# Altium PCB PCB_V11.PcbDoc
Units mm, origin at the board's own origin, x right, y up, seen from the top; angles counter-clockwise.
Board outline 38 x 30.4 mm, 4 copper layers (Top Layer, Int1 (GND), Int2 (GND), Bottom Layer), stack 1.11 mm thick; 32 components, 23 nets, 138 pads, 107 vias.
Unrouted connection lines stored in the file: 4.
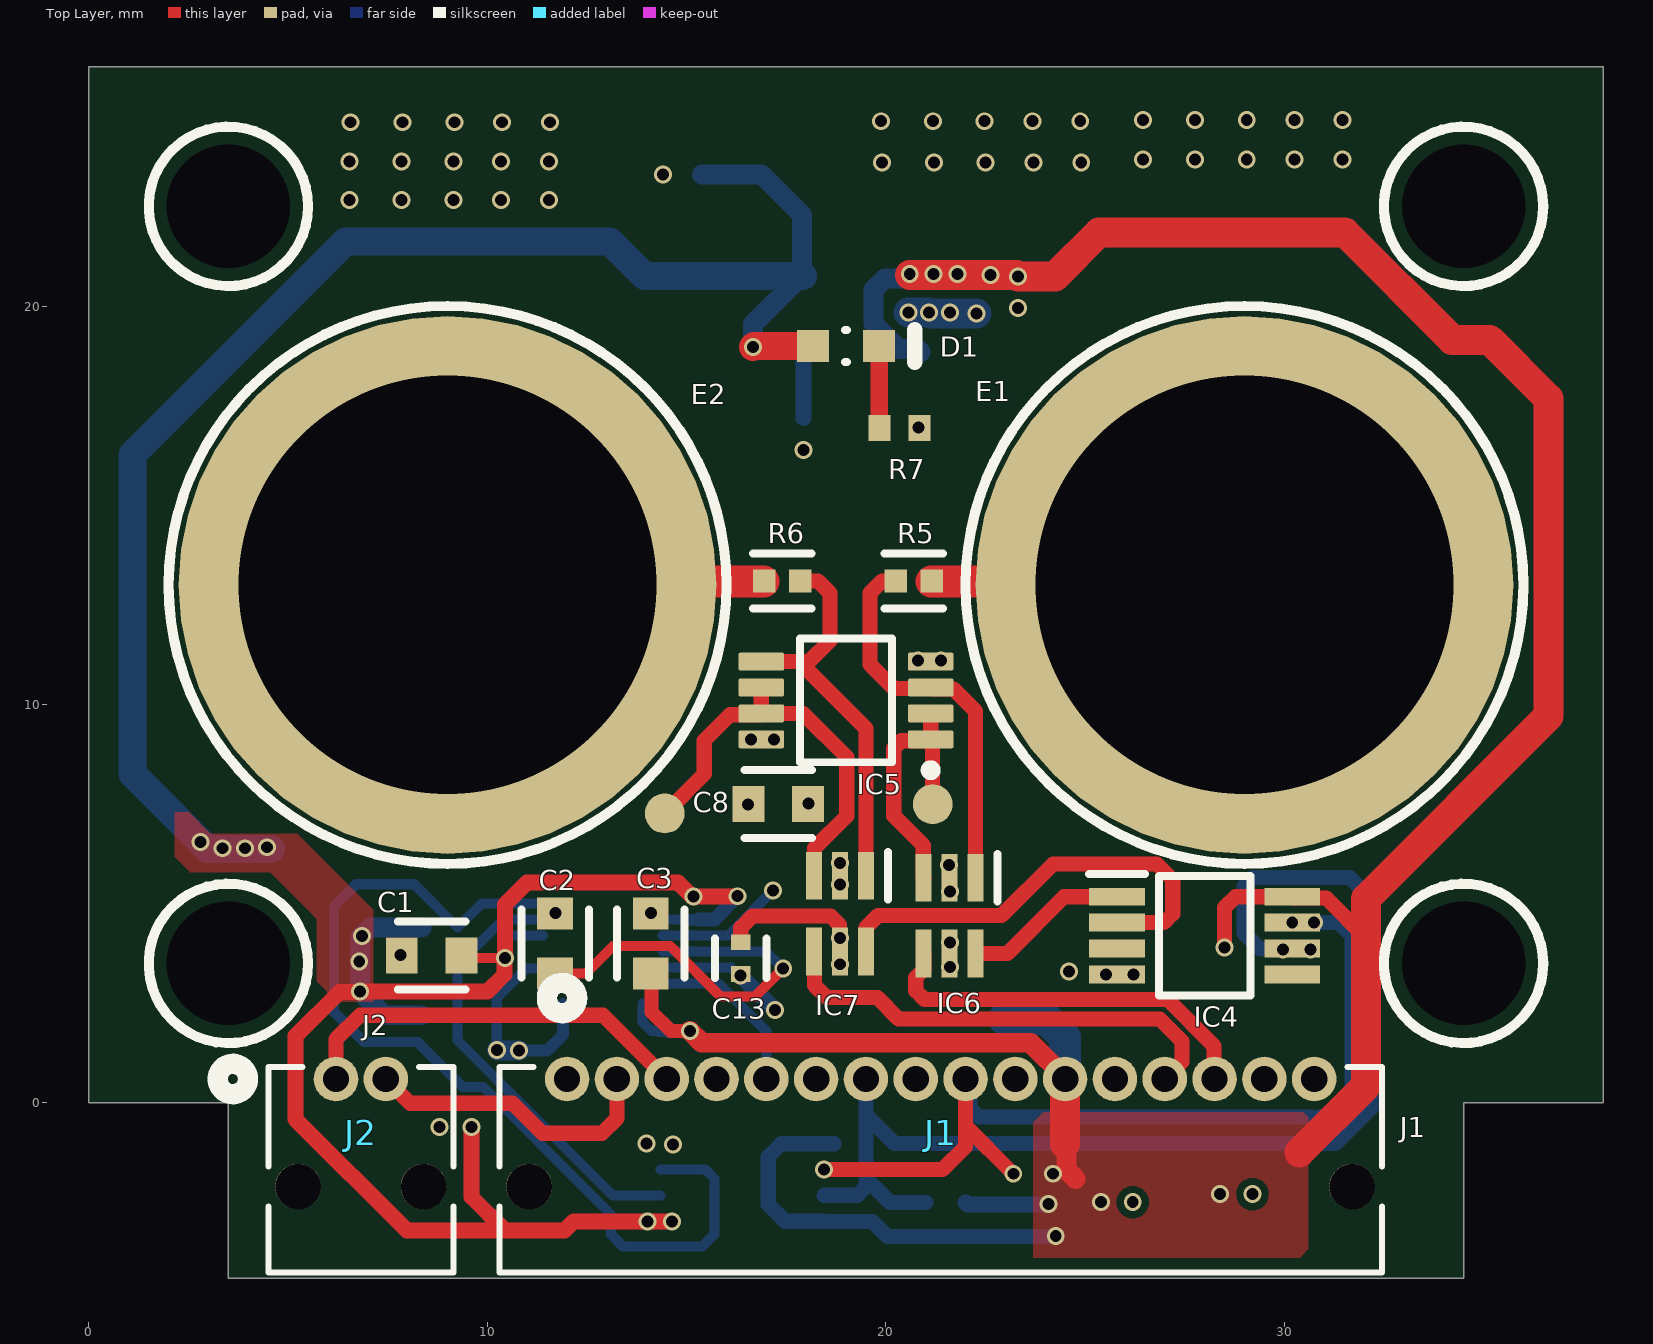
[diagram p0: Top Layer view]
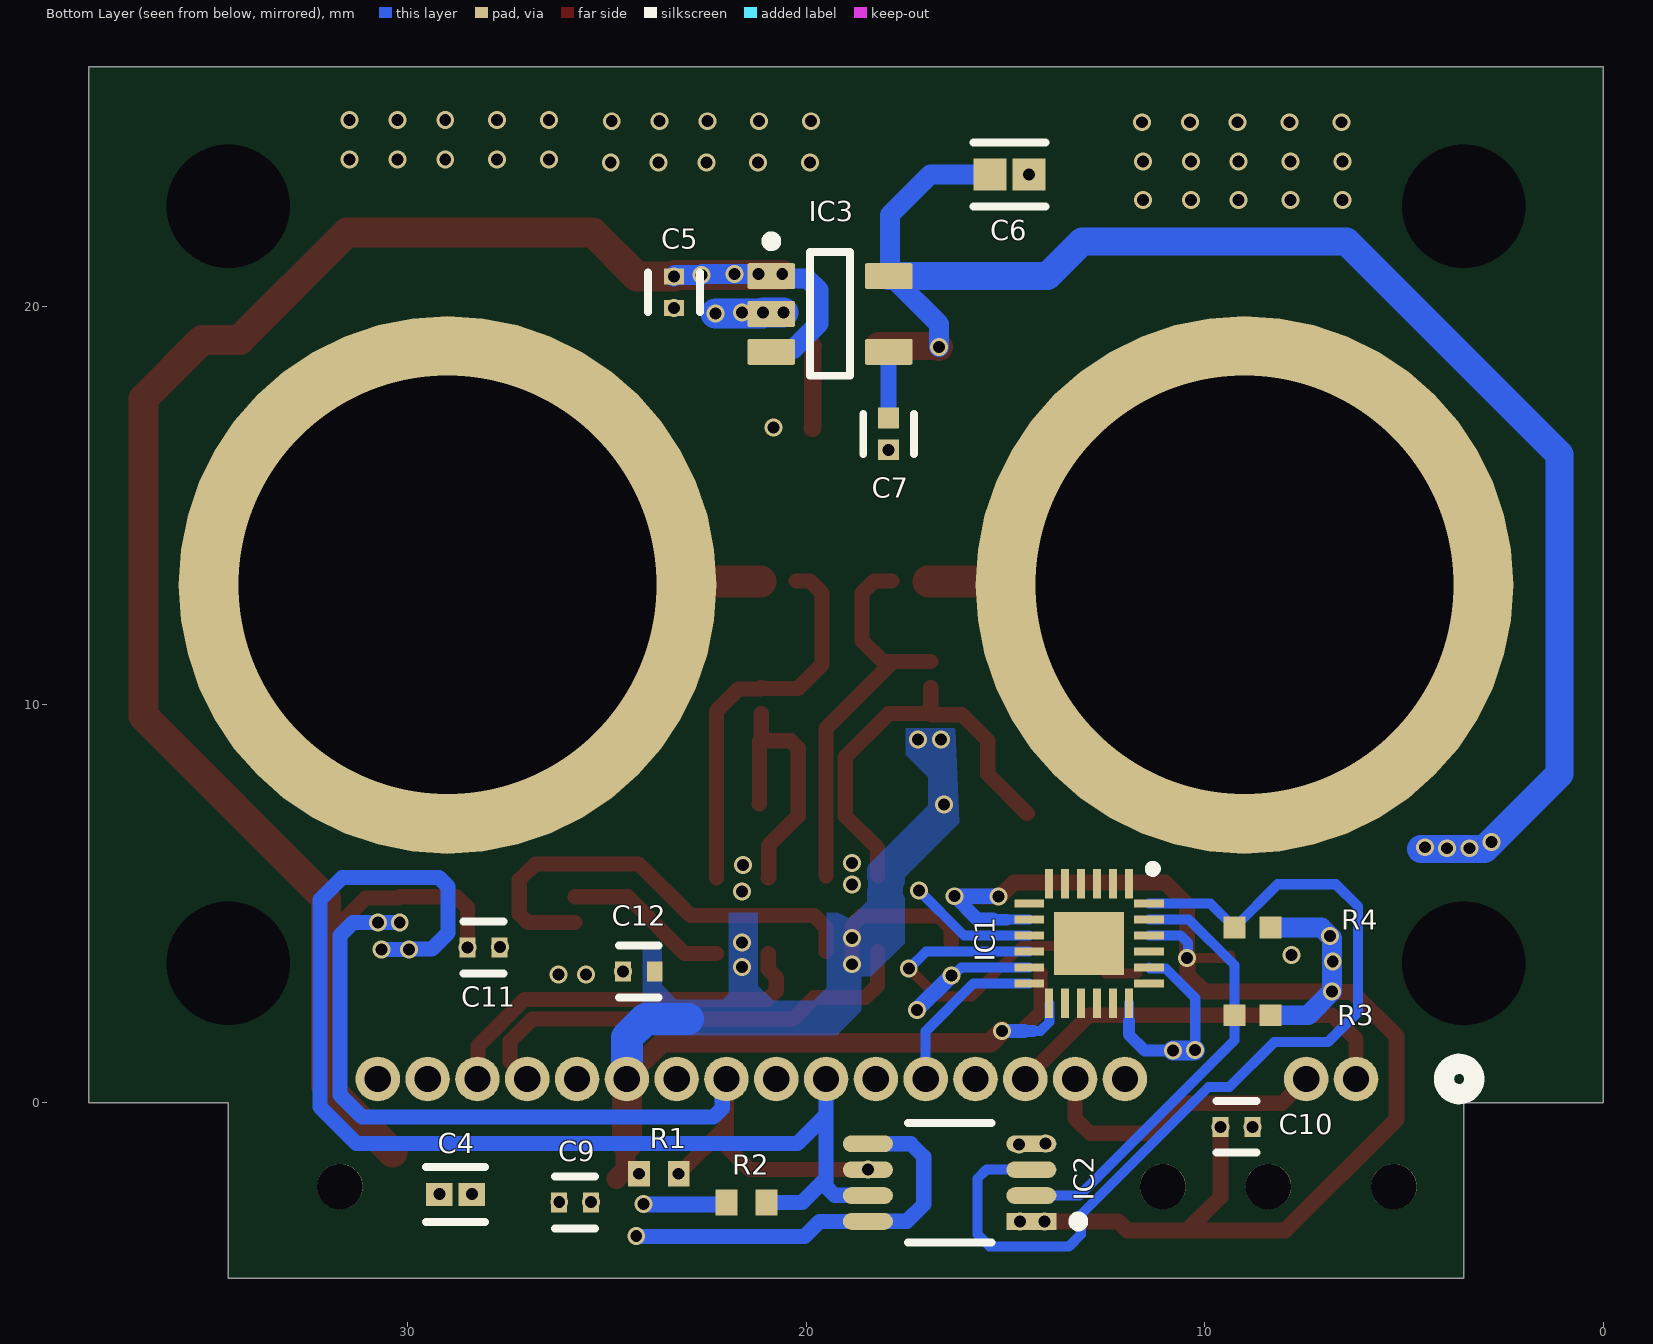
[diagram p1: Bottom Layer view, seen from below]
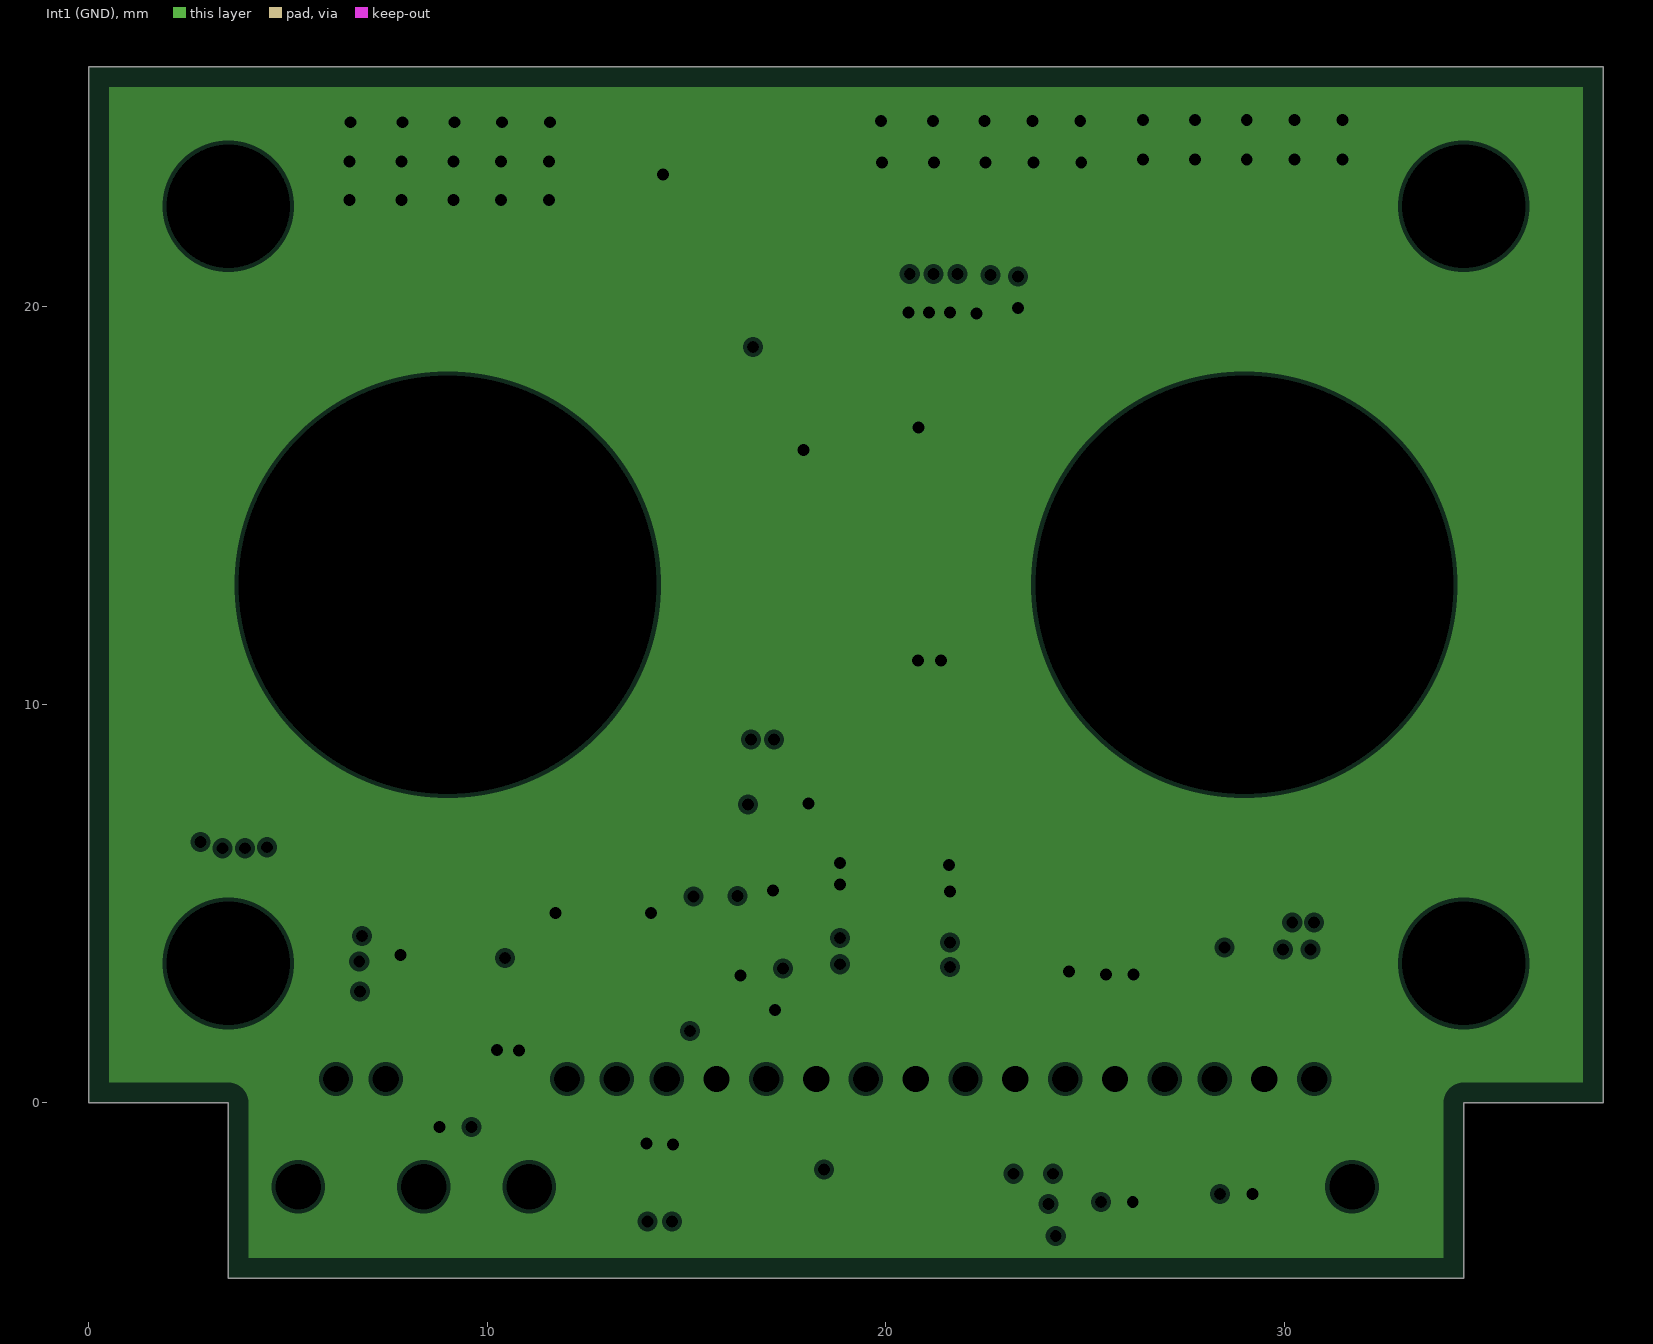
[diagram p2: Int1 (GND), clearances drawn from the general rule]
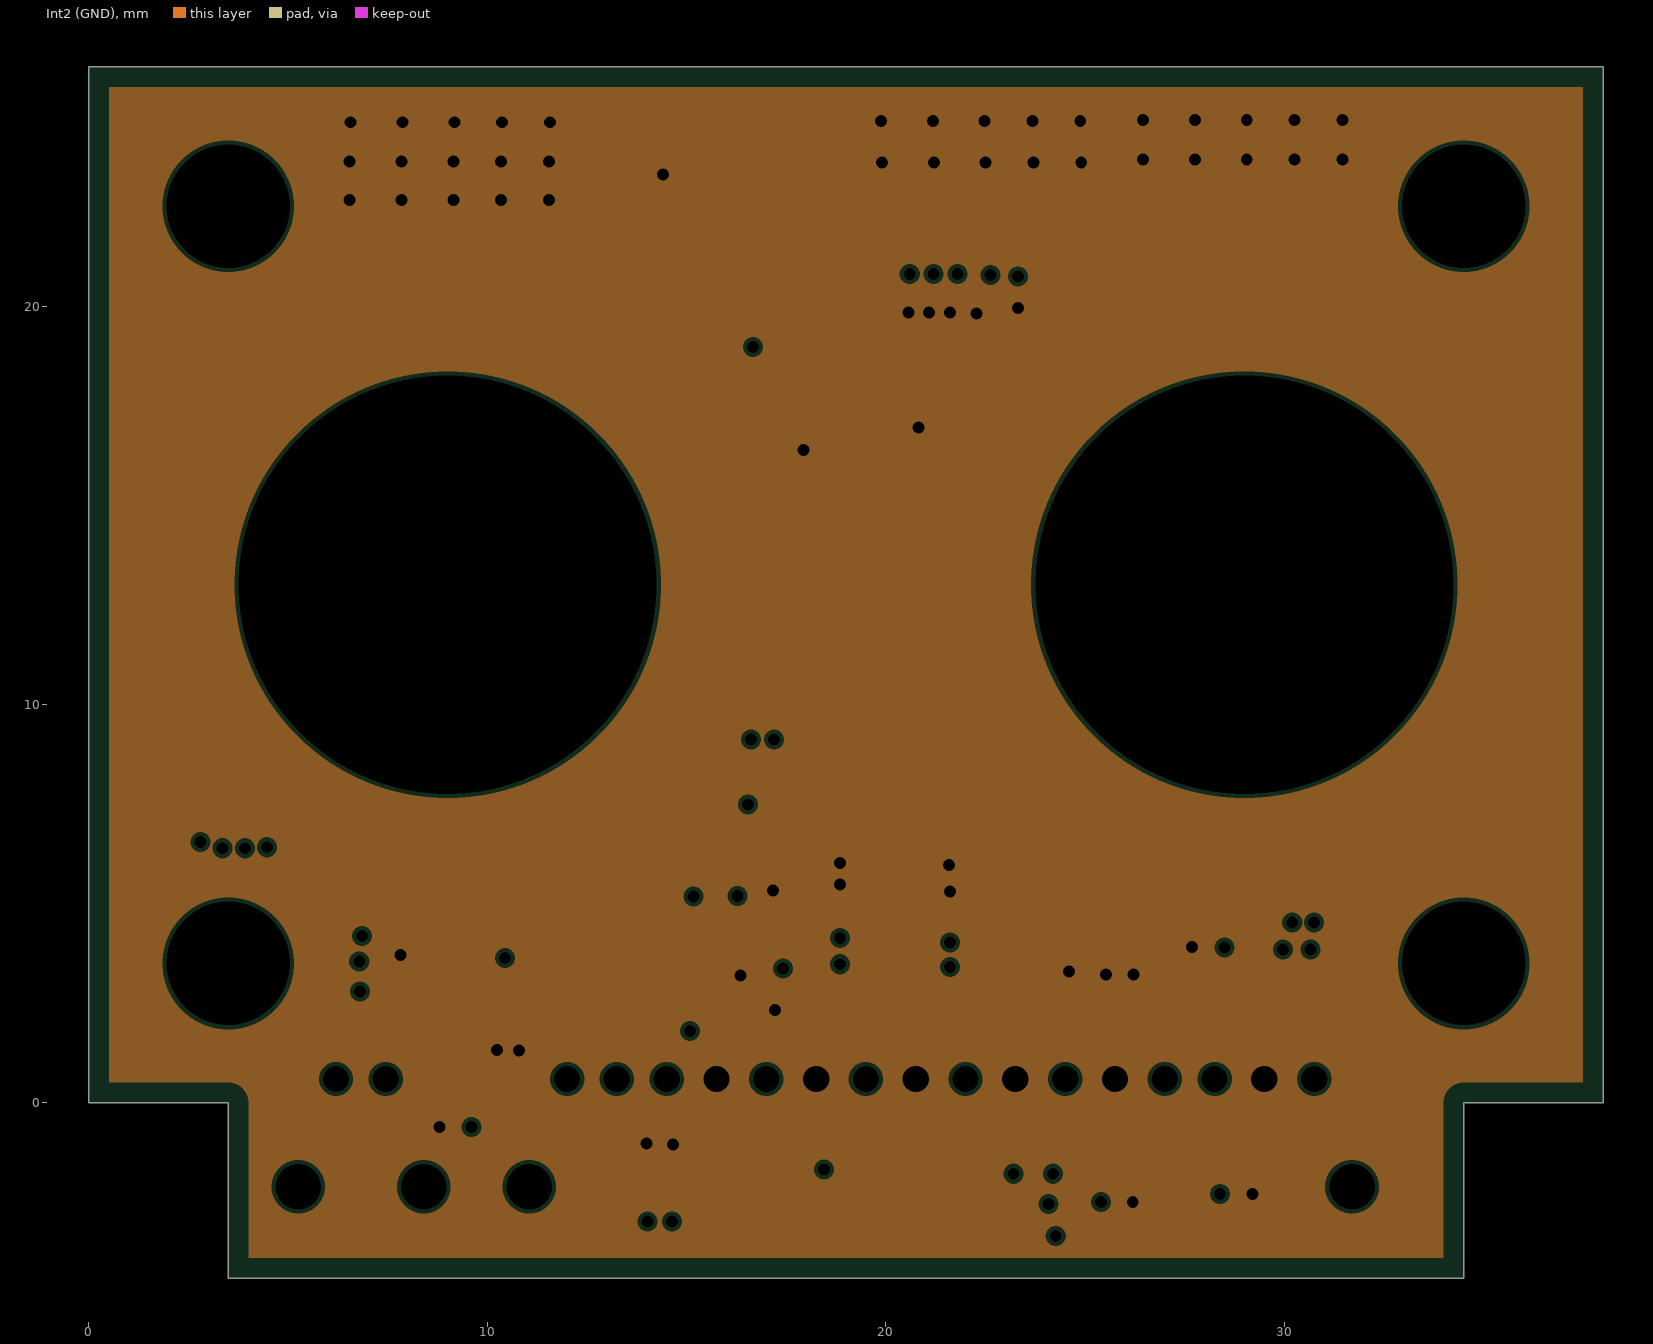
[diagram p3: Int2 (GND), clearances drawn from the general rule]
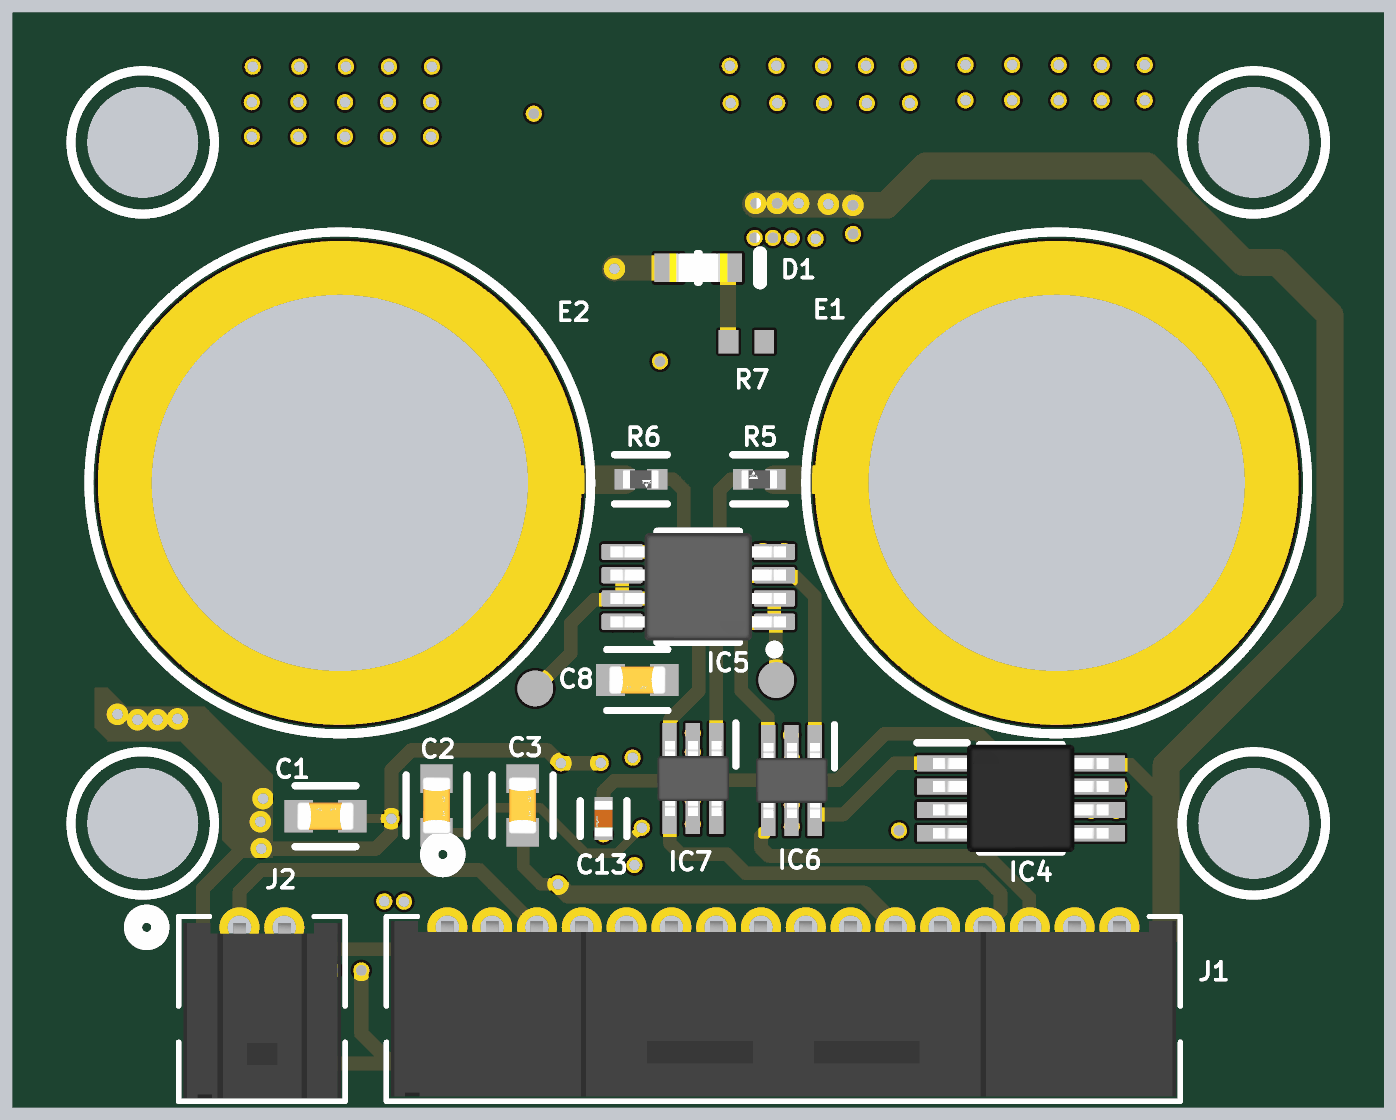
[diagram p4: 3D render of the assembled board from above, using the file's embedded part models]
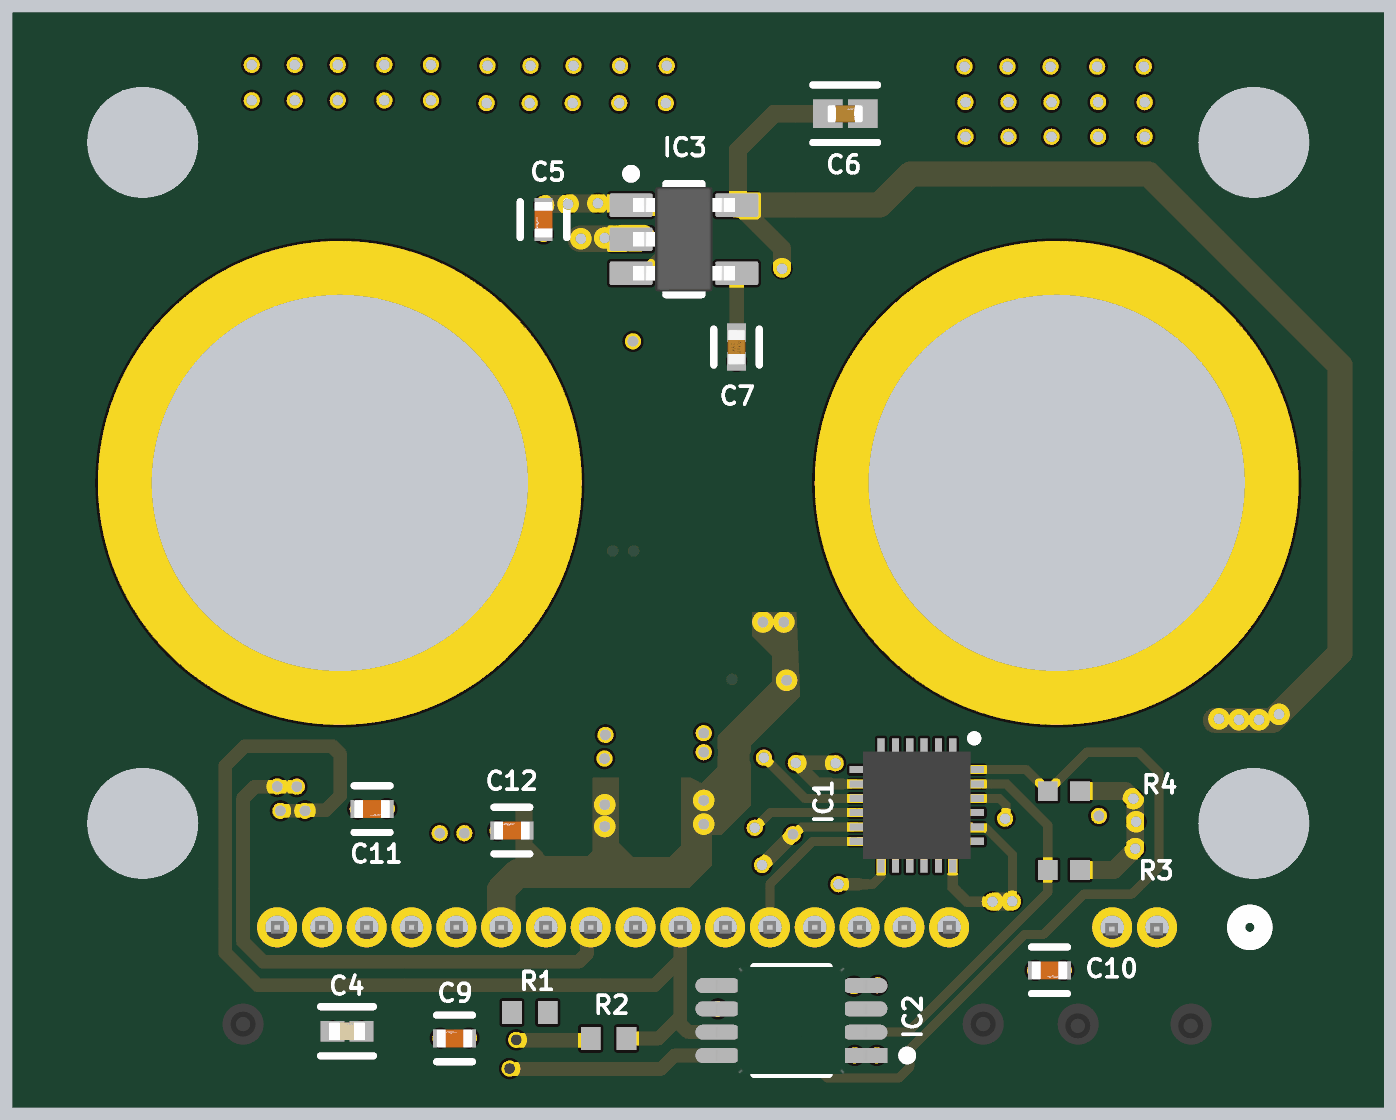
[diagram p5: 3D render of the assembled board from below, using the file's embedded part models]

## Layer stack, top to bottom
Top Solder: solder mask 0.0254, SM-001, Dk 4
Top Layer: signal copper 0.035
Dielectric 1: prepreg 0.1295, PP-017, Dk 4.3
Int1 (GND): plane copper 0.035, net GND
Dielectric 3: core 0.7112, Core-039, Dk 4.8
Int2 (GND): plane copper 0.035, net GND
Dielectric 5: prepreg 0.1295, PP-017, Dk 4.3
Bottom Layer: signal copper 0.035
Bottom Solder: solder mask 0.0254, SM-001, Dk 4

## Board outline
3.5,-4.4 34.5,-4.4 34.5,0 38,0 38,26 0,26 0,0 3.5,0

## Design rules (kind name [scope] priority, off if disabled: settings)
BoardOutlineClearance [All] p1: gap=0.2 ignorepadtopadclearanceinfootprint=FALSE
Clearance [All] p1: gap=0.102 ignorepadtopadclearanceinfootprint=TRUE except(0.127: Arc-Via Track-Via SMDPad-Via THPad-Via Via-Via Via-Fill Via-Poly Via-Region Via-Text; 0.25: Arc-Hole Track-Hole SMDPad-Hole THPad-Hole Via-Hole Fill-Hole Poly-Hole Region-Hole Text-Hole)
ComponentClearance [All] p1: gap=0.102 collisioncheckmode=3 verticalgap=0.102 showdistances=TRUE
DiffPairsRouting [All] p1: maxlimit=0.102 minlimit=0.102 mostfreqgap=0.102 toplayer_minwidth=0.102 toplayer_maxwidth=1816.048 toplayer_prefwidth=0.102 bottomlayer_minwidth=0.102 bottomlayer_maxwidth=1816.048 bottomlayer_prefwidth=0.102 maxuncoupledlength=12.7
Height [All] p1: minheight=0 maxheight=1816.048 prefheight=12.7
HoleSize [All] p1: absolutevalues=TRUE maxlimit=6.3 minlimit=0.2 maxpercent=80.000 minpercent=20.000
HoleToHoleClearance [All] p1: gap=0.25 allowstackedmicrovias=FALSE
MinimumAnnularRing [All] p1: minimumring=0.076
MinimumSolderMaskSliver [All] p1: minsoldermaskwidth=0
PlaneClearance [All] p1: clearance=0.102
PlaneConnect PlaneConnectPowerPads [InPadClass('PowerPads')] p1: planeconnectstyle=Direct reliefexpansion=0.508 reliefentries=4 reliefconductorwidth=0.254 reliefairgap=0.254
PlaneConnect [All] p2: pad.planeconnectstyle=Relief pad.reliefexpansion=0.3 pad.reliefentries=4 pad.reliefconductorwidth=0.102 pad.reliefairgap=0.102 via.planeconnectstyle=Direct via.reliefexpansion=0.3 via.reliefentries=4 via.reliefconductorwidth=0.127 via.reliefairgap=0.127
PolygonConnect PolygonConnect_1 [All vs IsNamedPolygon('+3V3_L04_P000')] p1: connectstyle=Direct reliefconductorwidth=0.254 reliefentries=4 polygonreliefangle="90 Angle" airgapwidth=0.254
PolygonConnect PolygonConnectPowerPads [All vs (InPadClass('PowerPads'))] p2: connectstyle=Direct reliefconductorwidth=0.254 reliefentries=4 polygonreliefangle="90 Angle" airgapwidth=0.254
PolygonConnect [All] p3: thpad.connectstyle=Relief thpad.reliefconductorwidth=0.102 thpad.reliefentries=4 thpad.polygonreliefangle="90 Angle" thpad.airgapwidth=0.102 smdpad.connectstyle=Relief smdpad.reliefconductorwidth=0.102 smdpad.reliefentries=4 smdpad.polygonreliefangle="90 Angle" smdpad.airgapwidth=0.102 via.connectstyle=Direct via.reliefconductorwidth=0.127 via.reliefentries=4 via.polygonreliefangle="90 Angle" via.airgapwidth=0.127
RoutingVias [All] p1: holewidth=0.2 width=0.45 viastyle="Through Hole" minholewidth=0.2 minwidth=0.45 maxholewidth=6.3 maxwidth=6.55
SilkToSilkClearance [All] p1: silktosilkclearance=0
SilkToSolderMaskClearance [IsPad] p1: minsilkscreentomaskgap=0.102 clearancetoexposedcopper=TRUE
SolderMaskExpansion [All] p1: expansion=0.075 istentingtop=FALSE
SupplyNets "Schematic Supply Nets_2" [InNet('+3V3')] p1: voltage=0.000
SupplyNets "Schematic Supply Nets_1" [InNet('GND')] p2: voltage=0.000
SupplyNets "Schematic Supply Nets" [InNet('1V8')] p3: voltage=0.000
Width [All] p1: maxlimit=1816.048 minlimit=0.102 preferedwidth=0.102
20 further rules are at their usual default settings.

## Classes and differential pairs
differential pair class DIFF90: BUFF_EMG CONN_EMG ELECTRODE NOT_BUFF_EMG
differential pair NOT_BUFF_EMG: +NOT_BUFF_EMG_P -NOT_BUFF_EMG_N
differential pair CONN_EMG: +CONN_EMG_P -CONN_EMG_N
differential pair BUFF_EMG: +BUFF_EMG_P -BUFF_EMG_N

## Components (designator, comment, footprint, x,y, rotation, side; value= is the part's Value field where it differs from the comment)
C1 "100nF" FP-CC0603-DA-MFG 8.6,3.7 r180 top value="100 nF"
C2 "100nF" FP-CC0603-DA-MFG 11.7,4 r90 top value="100 nF"
C3 "100nF" FP-CC0603-DA-MFG 14.1,4 r90 top value="100 nF"
C4 "1uF" FP-C0402C-BB-IPC_B 28.8,-2.3 r0 bottom
C5 "100nF" FP-GRM155-0_05-MFG 23.317,20.345 r270 bottom
C6 "10uF" FP-GRM155-0_2-IPC_A 14.9,23.3 r180 bottom
C7 "10nF" FP-C0402-BB-MFG 17.932,16.789 r270 bottom value="10,000 pF"
C8 "100nF" FP-CC0603-DA-MFG 17.3,7.5 r0 top value="100 nF"
C9 "100nF" FP-GRM155-0_05-MFG 25.8,-2.5 r0 bottom
C10 "100nF" FP-GRM155-0_05-MFG 9.2,-0.6 r180 bottom
C11 "100nF" FP-GRM155-0_05-MFG 28.1,3.9 r180 bottom
C12 "100nF" FP-GRM155-0_05-MFG 24.2,3.3 r0 bottom
C13 "100nF" FP-GRM155-0_05-MFG 16.358,3.632 r270 top
D1 "APT1608SGC" KING-APT1608SGC_V 19,19 r0 top
E1 "Electrode" ELECTRODE 29,13 r0 top locked
E2 "Electrode" ELECTRODE 9,13 r0 top
IC1 "ICM-20948" QFN40P300X300X105-25N-D 12.9,4 r270 bottom
IC2 "TCA9517ADGKR" FP-DGK0008A-IPC_C 16.4,-2 r0 bottom
IC3 "TPS79318DBVR" DBV0005A_M 19.4,19.8 r180 bottom
IC4 "TCA9536DGKR" SOP65P490X110-8N 28,4.2 r0 top
IC5 "OPA2376AIDGKR" OPA2376 19,10.1 r180 top
IC6 "TS5A3159ADCKR" SOT65P210X110-6N 21.6,4.7 r270 top
IC7 "TS5A3159ADCKR" SOT65P210X110-6N 18.85,4.75 r270 top
J1 "2200981671" CONN_2200980000-SD_16_MOL 12,0.6 r0 top
J2 "2200980271" 2X1_right_angle_THT_CON 6.2,0.6 r0 top
R1 "2.2k" RESC0402(1005)_N 23.698,-1.778 r0 bottom value="2200.00 Ohm"
R2 "2.2k" RESC0402(1005)_N 21.5,-2.5 r0 bottom value="2200.00 Ohm"
R3 "10k" RESC1005X40X20NL05T10 8.8,2.2 r180 bottom
R4 "10k" RESC1005X40X20NL05T10 8.8,4.4 r180 bottom
R5 "100R" FP-MCS0402-IPC_B 20.7,13.1 r180 top
R6 "100R" FP-MCS0402-IPC_B 17.4,13.1 r0 top
R7 "2.2k" RESC0402(1005)_N 20.345,16.942 r180 top value="2200.00 Ohm"

## Footprints (in the part's own frame and the unit in brackets; to place one, negate y for a bottom-side part, rotate by r counter-clockwise, add the part's x,y. Pads: shape width x height; smd on the part's side, far side on the other; paste and mask are expansions set on the pad)
2X1_right_angle_THT_CON [mil]
  round 44 hole 26 paste-99999 mask+0: 1(0,0) 2(49.21,0)
  round 45 hole 45 unplated paste-99999 mask+0: 3(-37.4,-106.3) 4(86.61,-106.3)
  silkscreen extent -117,-191 116,15, body extent -62,-188 112,5, height 140
CONN_2200980000-SD_16_MOL [mil]
  round 44 hole 26 paste-99999 mask+0: 1(0,0) 2(49.21,0) 3(98.43,0) 4(147.64,0) 5(196.85,0) 6(246.06,0) 7(295.28,0) 8(344.49,0) 9(393.7,0) 10(442.91,0) 11(492.13,0) 12(541.34,0) 13(590.55,0) 14(639.76,0) 15(688.98,0) 16(738.19,0)
  round 45 hole 45 unplated paste-99999 mask+0: 17(-37.4,-106.3) 18(775.59,-106.3)
  silkscreen extent -67,-191 805,95, body extent -62,-186 800,7, height 140
DBV0005A_M [mm] "SOT23, 5-Leads, Body 3.05x1.75mm, Pitch 0.95mm, IPC Low Density"
  rrect15% 1.2x0.65 smd: 1(-1.475,0.95) 2(-1.475,0) 3(-1.475,-0.95) 4(1.475,-0.95) 5(1.475,0.95)
  silkscreen extent -1.6,-1.55 0.5,1.95, body extent -1.42,-1.46 1.42,1.46, height 1.08
ELECTRODE [mm]
  round 13.5 hole 10.5: 1(0,0)
  silkscreen extent -7,-7 7,7
FP-C0402-BB-MFG [mm]
  rect 0.52x0.52 smd paste+0 mask+0: 1(-0.4,0) 2(0.4,0)
  silkscreen extent -0.5,-0.64 0.5,0.64, body extent -0.5,-0.25 0.5,0.25, height 0.55
FP-C0402C-BB-IPC_B [mm]
  rect 0.661x0.572 smd paste+0 mask+0: 1(-0.406,0) 2(0.406,0)
  silkscreen extent -0.74,-0.69 0.74,0.69, body extent -0.5,-0.25 0.5,0.25, height 0.55
FP-CC0603-DA-MFG [mm]
  rect 0.8x0.9 smd paste+0 mask+0: 1(-0.75,0) 2(0.75,0)
  silkscreen extent -0.85,-0.85 0.85,0.85, body extent -0.8,-0.4 0.8,0.4, height 0.9
FP-DGK0008A-IPC_C [mm]
  rect 1.257x0.418 smd paste+0 mask+0: 1(-2.051,0.975)
  rrect100% 1.257x0.418 smd paste+0 mask+0: 2(-2.051,0.325) 3(-2.051,-0.325) 4(-2.051,-0.975) 5(2.051,-0.975) 6(2.051,-0.325) 7(2.051,0.325) 8(2.051,0.975)
  silkscreen extent -3.35,-1.5 1.05,1.5, body extent -2.45,-1.5 2.45,1.5, height 1.1
FP-GRM155-0_2-IPC_A [mm]
  rect 0.828x0.806 smd paste+0 mask+0: 1(-0.489,0) 2(0.489,0)
  silkscreen extent -0.9,-0.8 0.9,0.8, body extent -0.5,-0.25 0.5,0.25, height 0.7
FP-GRM155-0_05-MFG [mm]
  rect 0.4x0.5 smd paste+0 mask+0: 1(-0.4,0) 2(0.4,0)
  silkscreen extent -0.5,-0.65 0.5,0.65, body extent -0.5,-0.25 0.5,0.25, height 0.55
FP-MCS0402-IPC_B [mm]
  rect 0.565x0.572 smd paste+0 mask+0: 1(-0.454,0) 2(0.454,0)
  silkscreen extent -0.74,-0.69 0.74,0.69, body extent -0.89,-0.44 0.89,0.44, height 0.25
KING-APT1608SGC_V [mm] "SMD, 2-Leads, Body 0.8x1.6mm"
  rect 0.8x0.8 smd: 1(-0.825,0) 2(0.825,0)
  silkscreen extent -0.03,-0.4 1.73,0.4, body extent -0.8,-0.4 0.81,0.4, height 0.76
OPA2376 [mm] "TSOP, 8-Leads, Body 3.1x3.1mm, Pitch 0.65mm, IPC High Density"
  rrect22% 1.15x0.45 smd: 1(-2.125,0.975) 2(-2.125,0.325) 3(-2.125,-0.325) 4(-2.125,-0.975) 5(2.125,-0.975) 6(2.125,-0.325) 7(2.125,0.325) 8(2.125,0.975)
  silkscreen extent -2.25,-1.55 1.15,1.87, body extent -2.45,-1.5 2.45,1.5, height 0.94
QFN40P300X300X105-25N-D [mm]
  rect 0.75x0.2 smd: 1(-1.5,1) 2(-1.5,0.6) 3(-1.5,0.2) 4(-1.5,-0.2) 5(-1.5,-0.6) 6(-1.5,-1) 13(1.5,-1) 14(1.5,-0.6) 15(1.5,-0.2) 16(1.5,0.2) 17(1.5,0.6) 18(1.5,1)
  rect 0.2x0.75 smd: 7(-1,-1.5) 8(-0.6,-1.5) 9(-0.2,-1.5) 10(0.2,-1.5) 11(0.6,-1.5) 12(1,-1.5) 19(1,1.5) 20(0.6,1.5) 21(0.2,1.5) 22(-0.2,1.5) 23(-0.6,1.5) 24(-1,1.5)
  rect 1.59x1.75 smd: 25(0,0)
  silkscreen extent -1.97,1.5 -1.78,1.7, body extent -1.5,-1.5 1.51,1.51, height 1
RESC0402(1005)_N [mm] "Chip Resistor, Body 1.0x0.5mm, IPC Medium Density"
  rect 0.55x0.65 smd: 1(-0.5,0) 2(0.5,0)
  body extent -0.52,-0.27 0.53,0.28, height 0.4
RESC1005X40X20NL05T10 [mm] "Chip Resistor, 2-Leads, Body 1.00x0.50mm, IPC Medium Density"
  rect 0.55x0.55 smd: 1(-0.45,0) 2(0.45,0)
  body extent -0.53,-0.27 0.53,0.28, height 0.4
SOP65P490X110-8N [mm]
  rect 1.4x0.45 smd: 1(-2.2,0.975) 2(-2.2,0.325) 3(-2.2,-0.325) 4(-2.2,-0.975) 5(2.2,-0.975) 6(2.2,-0.325) 7(2.2,0.325) 8(2.2,0.975)
  silkscreen extent -2.9,-1.5 1.15,1.55, body extent -2.45,-1.5 2.45,1.5, height 1.1
SOT65P210X110-6N [mm]
  rect 1.2x0.4 smd: 1(-0.95,0.65) 2(-0.95,0) 3(-0.95,-0.65) 4(0.95,-0.65) 5(0.95,0) 6(0.95,0.65)
  silkscreen extent -1.55,1.2 -0.35,1.2, body extent -1.05,-0.99 1.05,1.01, height 1

## Part data
C1 C2 C3 C8: library part CMP-2100-03601-2, "100nF 50V X7R ±10% 0603 Multilayer Ceramic Capacitors MLCC - SMD/SMT ROHS", Capacitance="100 nF", Manufacturer=YAGEO, Manufacturer Part Number=CC0603KRX7R9BB104, Package=CC0603-DA, Temperature="-55°C to +125°C", Temperature Characteristic=X7R, Temperature Coefficient=15%, Temperature Range High=+125°C, Temperature Range Low=-55°C, Tolerance=0.1, Voltage="50 V", Automotive=No, Category=Cap, ComponentLink2Description=Datasheet, ComponentLink2URL=http://www.yageo.com/documents/recent/UPY-GPHC_X7R_6.3V-to-50V_18.pdf, Device Class L1="Passive Components", Device Class L2=Capacitors, Device Class L3="Ceramic Capacitors", Digikey Description="CAP CER 0.1UF 50V X7R 0603", Footprint Url=http://www.yageo.com/exep/pages/download/literatures/UPY-C_GEN_24.pdf, Height=0.9mm, Lead Free=Yes, Material=Ceramic, Mouser Description="Multilayer Ceramic Capacitor, CC Series, 0.1 - F, - 10%, X7R, 50 V, 0603 [1608 Metric]", Octopart=https://octopart.com/cc0603krx7r9bb104-yageo-42244635, RoHS=TRUE, Voltage Rating="50 V"
C4: library part CMP-03020-034679-1, "CAP CER 1UF 16V X5R 0402", Case Code (Imperial)=0402, Case Code (Metric)=1005, Dielectric=X5R, Dielectric Material=Ceramic, Max Operating Temperature=85°C, Min Operating Temperature=-55°C, MPN=C0402C105K4PACTU, Tolerance=10%, Voltage Rating=16V, Capacitance=1uF, Case/Package=0402, Lead Free="Lead Free", Length=0.039inch, Mount="Surface Mount", Packaging="Cut Tape", REACH SVHC="No SVHC", RoHS Compliant=Yes, Thickness=0.022inch, Voltage Rating (DC)=16V, Width=0.02inch
C5 C9 C10 C11 C12 C13: library part CMP-06035-019038-1, "Chip Multilayer Ceramic Capacitors for General Purpose, 0402, 0.10uF, X7S, 22%, 10%, 50V", Dielectric=X7S, MPN=GRM155C71H104KE19D, Tolerance=10%, Voltage Rating (DC)=50V, Capacitance=100nF, Length=1mm, Thickness=500um, Width=500um
C6: library part CMP-06035-026070-1, "Chip Multilayer Ceramic Capacitors for General Purpose, 0402, 10uF, X5R, 15%, 20%, 10V", MPN=GRM155R61A106ME11D
C7: library part CMP-2008-02357-2, "C0402 10,000 pF X7R 10.00% 50 V", Capacitance="10,000 pF", Manufacture part Number=C0402C103K5RAC7411, Manufacturer=Kemet, Package=C0402-BB, Temperature="-55°C to +125°C", Temperature Characteristic=X7R, Temperature Coefficient=15%, Temperature Range High=+125°C, Temperature Range Low=-55°C, Tolerance=0.1, Voltage Rating="50 V", Automotive=No, Category=Cap, ComponentLink2Description=Datasheet, ComponentLink2URL=https://content.kemet.com/datasheets/KEM_C1002_X7R_SMD.pdf, Device Class L1="Passive Components", Device Class L2=Capacitors, Device Class L3="Ceramic Capacitors", Height=0.55mm, Ipc Land Pattern Name=CAPC10050X50, Lead Free=Yes, Manufacturer Part Number=C0402C103K5RAC7411, Material=Ceramic, Octopart=https://octopart.com/c0402c103k5rac7411-kemet-25528449, RoHS=TRUE
D1: library part CMP-2000-05789-1, "Super Bright Green LED, 62.5 mW, 25 mA, -40 to 85 degC, 2-Pin SMD, RoHS, Tape and Reel", Color=Green, Current - Test=20mA, Manufacturer=Kingbright, Millicandela Rating=15mcd, Package / Case=0603(1608Metric), Package Description="2-Pin Surface Mount Device, Body 0.8 x 1.6 mm", Standard Package=2,000, Voltage - Forward (Vf) (Typ)=2.2V, 3D Model="APT1608x.sldprt /  / APT1608x.pro /  / APT1608x.igs /  / APT1608x.stp", Catalog Drawings="APT1608SeriesTop /  / APT1608SeriesSide", Category=Optoelectronics, Datasheet URL=https://datasheet.ciiva.com/2113/apt1608sgc-2113808.pdf, Datasheet Version="Rev. 16B, 02/2012", Family=LEDIndication-Discrete, Height=0.75mm, Lens Style/Size=RectanglewithFlatTop,1.2mmx0.8mm, Lens Type=Clear, Manufacturer URL=http://www.kingbright.com/, Mounting Technology=SurfaceMount, Mounting Type=SurfaceMount, Online Catalog=0603RectanglewithFlatTopChipLEDs, Other Names=754-1121-2, Package Reference=APT1608SGC, Packaging=Tape&Reel(TR), Size / Dimension=1.60mmLx0.80mmW, Viewing Angle=120°, Wavelength - Dominant=568nm, Wavelength - Peak=565nm
IC1: "Integrated Circuit", Manufacturer_Name=TDK, Mouser Part Number=410-ICM-20948, Arrow Part Number=ICM-20948, Arrow Price/Stock=https://www.arrow.com/en/products/icm-20948/invensense.html?utm_currency=USD&region=nac, Datasheet Link=https://www.digikey.ph/en/products/detail/tdk-invensense/ICM-20948/6623535?msockid=3bdc366bbe0663d83c1223c0bf3662a6, Height=1.05mm, Manufacturer_Part_Number=ICM-20948, Mouser Price/Stock=https://www.mouser.co.uk/ProductDetail/TDK-InvenSense/ICM-20948?qs=u4fy%2FsgLU9OtGc31yF%2Friw%3D%3D
IC2: library part CMP-04899-000095-1, "IC TRNSLTR BIDIRECTIONAL 8VSSOP", Case/Package=VSSOP, Input Capacitance=8pF, Max Frequency=400kHz, Max Operating Temperature=85°C, Min Operating Temperature=-40°C, Operating Supply Voltage=5.5V, Package Quantity=2500, Channel Type=Bidirectional, Lead Free="Lead Free", Logic Function=Translator, Mount="Surface Mount", Number of Bits=2, Number of Channels=2, Number of Circuits=1, Number of Outputs=2, Number of Pins=8, Output Type=Voltage, Packaging="Tape and Reel", Propagation Delay=110ns, Radiation Hardening=No, RoHS Compliant=Yes, Turn-On Delay Time=141ns
IC3: library part CMP-0394-00328-2, "Single Output High PSRR LDO, 200 mA, Fixed 1.8 V Output, 2.7 to 5.5 V Input, 5-pin SOT-23 (DBV), -40 to 85 degC, Green (RoHS & no Sb/Br)", Manufacturer="Texas Instruments", Rating=Catalog, Accuracy(%)=2, Code_JEDEC=MO-178, ComponentLink1Description="Manufacturer URL", ComponentLink1URL=http://www.ti.com/, ComponentLink2Description=Datasheet, ComponentLink2URL=http://www.ti.com/general/docs/lit/getliterature.tsp?genericPartNumber=TPS79318&fileType=pdf, ComponentLink3Description="Package Specification", ComponentLink3URL=http://www.ti.com/litv/pdf/mpds018i, DatasheetVersion=SLVS348K, Eco-Plan="Green (RoHS & no Sb/Br)", Fixed Output Options(V)=1.8, Iout(Max)(A)=0.2, Iq(Typ)(mA)=0.2, Mounting Technology="Surface Mount", PackageDescription="5-Pin Plastic Small Outline, Body 1.60 Ãƒâ€” 2.90 mm, Pitch 0.95 mm", PackageReference=DBV0005A, PackageVersion=4073253-4/K, PartNumber=TPS79318DBVR, SubFamily="Single Channel LDO", Vdo(Typ)(mV)=112, Vin(Max)(V)=5.5, Vin(Min)(V)=2.7, Vout Adj(Max)(V)=1.8, Vout Adj(Min)(V)=1.8
IC4: "Integrated Circuit", Manufacturer_Name="Texas Instruments", Mouser Part Number=595-TCA9536DGKR, Arrow Part Number=TCA9536DGKR, Arrow Price/Stock=https://www.arrow.com/en/products/tca9536dgkr/texas-instruments.html?utm_currency=USD&region=nac, Datasheet Link=https://www.ti.com/lit/ds/symlink/tca9536.pdf?ts=1641403369587&ref_url=https%253A%252F%252Fwww.ti.com%252Fproduct%252FTCA9536, Height=1.1mm, Manufacturer_Part_Number=TCA9536DGKR, Mouser Price/Stock=https://www.mouser.co.uk/ProductDetail/Texas-Instruments/TCA9536DGKR?qs=doiCPypUmgHJyc0NMelqCA%3D%3D
IC5: "IC OPAMP GP 2 CIRCUIT 8VSSOP"
IC6 IC7: "IC SWITCH SPDTX1 900MOHM SC70-6", Manufacturer_Name="Texas Instruments", Mouser Part Number=595-TS5A3159ADCKR, Arrow Part Number=TS5A3159ADCKR, Arrow Price/Stock=https://www.arrow.com/en/products/ts5a3159adckr/texas-instruments.html?utm_currency=USD&region=nac, Datasheet Link=http://www.ti.com/lit/gpn/ts5a3159a, Height=1.1mm, Manufacturer_Part_Number=TS5A3159ADCKR, Mouser Price/Stock=https://www.mouser.co.uk/ProductDetail/Texas-Instruments/TS5A3159ADCKR?qs=0O%2FZFlpUpJWT7PTKGuP8wA%3D%3D
J1: "Connector Header Through Hole, Right Angle 16 position 0.049\" (1.25mm)", MPN=2200981671
J2: library part 2X1_RHTANG_HDR, "Molex connector"
R1 R2 R7: library part CMP-1011-00082-1, "2K2 0.063W 5% 0402 (1005 Metric)  SMD", Case-EIA=0402, Case-Metric=1005, MPN=CRCW04022K20JNTD, Power="0.063 W", Tolerance="5 %", Technology=SMT
R3 R4: library part CMP-2002-01682-1, Manufacturer="Vishay BCcomponents", Part Number=TNPW040210K0DEED
R5 R6: library part CMP-02407-000550-1, "RES SMD 1.2K OHM 1% 1/10W 0402", Case Code (Imperial)=0402, Case Code (Metric)=1005, Max Operating Temperature=175°C, Max Power Dissipation=100mW, Min Operating Temperature=-55°C, MPN=MCS0402MD1000DE000, Package Quantity=10000, Temperature Coefficient=25ppm/°C, Tolerance=0.5%, Voltage Rating=50V, Case/Package=0402, Composition="Thin Film", Contact Plating=Tin, Features="Automotive AEC-Q200", Height=0.015inch, Lead Free="Lead Free", Length=0.039inch, Number of Terminations=2, Packaging="Tape and Reel", Power Rating=100mW, Resistance=100R, Termination=SMD/SMT, Weight=2.3E-05oz, Width=0.02inch

## Free pads (board coordinates)
  round 1.524 hole 3.1 unplated: 11(3.5,22.5) 12(3.5,3.5) 13(34.5,3.5) 14(34.5,22.5)
  round 1 smd: 15(14.453,7.264) 16(21.177,7.499)

## Via types
v1: diameter 0.45, hole 0.3, Top Layer to Bottom Layer, 101 vias
v2: diameter 0.45, hole 0.3, Top Layer to Int1 (GND), 5 vias
v3: diameter 0.45, hole 0.3, Int2 (GND) to Bottom Layer, 1 vias

## Nets (pads, with @x,y where several pads share a name; then routed paths per layer and width w, separated by ;. In a path a pad name is that pad's centre, name@x,y a point inside that pad or via, vN(x,y) a via of type N, cw(c..) or ccw(c..) an arc to the next point about the centre after c; other vN are vias at no path point)
1V8: C1.1 C6.1 C10.1 D1.1 IC1.8 IC1.22 IC2.1 IC3.5 R3.2 R4.2 | length 80
  Top Layer w0.254: C1.1 9.418,3.632 v1(10.439,3.632)
  Top Layer w0.4: v1(9.6,-0.6) 9.6,-2.361 10.439,-3.2 ; v1(14.63,-2.972) 12.167,-2.972 11.938,-3.2 10.439,-3.2 ; v1@15.116,5.203 14.782,5.537 10.998,5.537 10.439,4.978 v1(10.439,3.632) 10.43,3.623 10.43,3.223 10.001,2.794 v1(6.807,2.794) 6.798,2.784 6.29,2.784 5.182,1.676 5.182,-0.406 7.976,-3.2 10.439,-3.2 ; v1@15.181,5.188 15.186,5.183 16.274,5.183 v1(16.279,5.187)
  Top Layer w0.7: v1(16.662,18.974) 16.689,19 D1.1
  Bottom Layer w0.254: v1@10.414,3.632 10.414,4.013 10.601,4.2 IC1.22 ; IC1.8 14.958,4.6 14.961,4.597
  Bottom Layer w0.3: 14.961,4.597 15.304,4.597
  Bottom Layer w0.35: 15.31,4.604 15.695,4.604 v1(16.279,5.187)
  Bottom Layer w0.4: v1@15.182,5.179 15.19,5.187 v1(16.279,5.187)
  Bottom Layer w0.5: R3.2 7.401,2.2 v1(6.807,2.794) 6.807,4.14 v1(6.858,4.191) 7.067,4.4 R4.2 ; C6.1 16.883,23.3 17.894,22.288 IC3.5@17.894,20.775 ; v1(16.662,18.974) 16.662,19.543 IC3.5@17.869,20.75
  Bottom Layer w0.7: v1@4.572,6.375 3.913,6.375 2.972,6.375 1.092,8.255 1.092,16.273 6.435,21.615 13.081,21.615 13.946,20.75 IC3.5@17.869,20.75 ; IC3.5@17.894,20.775 IC3.5@17.869,20.75 ; IC3.5 IC3.5@17.869,20.75
  other v1: 14.021,-2.972 6.784,3.546 15.167,5.178 3.355,6.391 3.913,6.391 4.472,6.416 2.796,6.543
+3V3: C3.1 C4.1 C5.1 C8.1 C9.1 C11.1 C12.1 C13.1 IC1.13 IC2.5 IC2.8 IC3.1 IC3.3 IC4.8 IC5.8 IC6.5 IC7.5 J1.11 R1.2 R2.2 | length 86.9
  Top Layer w0.35: C3.1 14.122,3.228 14.122,2.286 14.605,1.803 v1(15.088,1.803)
  Top Layer w0.381: C13.1 16.358,4.394 16.656,4.692 18.617,4.692 18.84,4.469 18.84,4.147 v1(18.847,4.14) ; IC7.5@18.853,3.486 IC7.5@18.853,4.134 ; v1(28.5,3.9) 28.5,4.903 28.772,5.175 IC4.8 30.235,5.14 31.055,5.14 32.055,4.14
  Top Layer w0.5: v1(15.088,1.803) 15.381,1.51 23.627,1.51 24.5,0.637 J1.11 ; 24.5,-1.03 24.536,-1.067 24.536,-1.676 24.765,-1.905
  Top Layer w0.75: v1@20.6,20.777 21.2,20.777 21.8,20.777 23.285,20.777 v1(23.317,20.745) 24.251,20.745 25.349,21.844 31.521,21.844 34.214,19.152 35.154,19.152 36.627,17.678 36.627,9.703 32.055,5.131 32.055,4.14 32.055,0.432 30.378,-1.245 ; 24.5,-1.03 J1.11
  Bottom Layer w0.254: IC1.13@13.894,2.494 13.894,2.032 14.122,1.803 14.3,1.803
  Bottom Layer w0.3: 14.3,1.803 14.529,1.803
  Bottom Layer w0.35: 14.529,1.803 v1(15.088,1.803)
  Bottom Layer w0.381: IC2.5@18.7,-1.025 IC2.5 17.375,-1.025 17.05,-1.35 17.05,-2.55 17.468,-2.968 18.444,-2.968 IC2.8 19.663,-2.975 20.041,-3.353 v1@24.264,-3.353
  Bottom Layer w0.4: R2.2 22.053,-2.553 24.066,-2.553 v1(24.079,-2.54)
  Bottom Layer w0.5: IC3.3@20.87,18.845 20.79,18.925 20.32,18.925 19.685,19.56 19.685,20.397 19.978,20.69 20.525,20.69 20.6,20.765 v1(20.6,20.8) v1(21.2,20.8) v1(21.8,20.8) 22.609,20.8 v1(22.631,20.777) 23.285,20.777 v1(23.317,20.745)
  Bottom Layer w0.8: 22.966,2.108 24.031,2.108 24.5,1.64 J1.11
  other v1: 24.264,-3.341 25.396,-2.49 28.391,-2.29 24.198,-1.778 21.608,3.411 18.847,3.48 21.608,4.021 16.535,7.493 16.612,9.119 17.196,9.119
BUFF_EMG_N: IC5.6 IC5.7 IC7.3 pad.15 | length 10.5
  Top Layer w0.381: pad.15 15.443,8.255 15.443,9.093 16.091,9.741 16.84,9.741 IC5.7 ; IC5.6 IC5.7 ; IC7.3 18.209,5.71 18.209,6.396 19.017,7.204 19.017,8.683 17.925,9.775 IC5.7
BUFF_EMG_P: IC5.1 IC5.2 IC6.3 pad.16 | length 6.9
  Top Layer w0.381: IC6.3 20.94,5.66 20.94,6.459 20.2,7.2 20.2,8.902 20.389,9.09 21.09,9.09 IC5.1 IC5.1@21.132,9.125 ; IC5.2 21.125,9.132 IC5.1@21.132,9.125 ; pad.16 21.167,7.51 21.167,9.09 IC5.1@21.132,9.125
CONN_EMG_N: IC7.4 J1.13 | length 11.8
  Top Layer w0.381: IC7.4 18.209,3.791 18.209,2.949 18.517,2.642 19.787,2.642 20.319,2.109 26.874,2.109 27.434,1.549 27.434,1.034 J1.13
CONN_EMG_P: IC6.4 J1.14 | length 9.9
  Top Layer w0.381: IC6.4 20.95,3.35 20.749,3.149 20.749,2.815 20.973,2.592 27.074,2.592 28.24,1.426 28.24,0.61 J1.14
ELECTRODE_N: E2.1 R6.1 | length 8
  Top Layer w0.8: E2.1 9.088,13.088 R6.1@16.935,13.088
ELECTRODE_P: E1.1 R5.1 | length 7.9
  Top Layer w0.8: R5.1@21.142,13.088 28.912,13.088 E1.1
GND: C1.2 C2.2 C3.2 C4.2 C5.2 C6.2 C7.2 C8.2 C9.2 C10.2 C11.2 C12.2 C13.2 IC1.9 IC1.11 IC1.18 IC1.20 IC2.4 IC3.2 IC4.4 IC5.4 IC6.2 IC7.2 J1.4 J1.6 J1.8 J1.10 J1.12 J1.15 R7.1 | length 13.6
  Bottom Layer w0.254: v1(10.241,1.325) 10.236,1.329 10.236,2.634 10.975,3.373 11.373,3.373 IC1.20 ; 11.9,2.057 IC1.18 ; IC1.11 16.111,3.4 16.293,3.218 v1@16.358,3.218 ; IC1.9 16.036,4.2 v1(17.17,5.334)
  Bottom Layer w0.3: v1(10.791,1.316) 11.502,1.316 11.9,1.715 11.9,2.057
  Bottom Layer w0.381: J1.4@15.77,0.57 J1.4@15.8,0.6
  Bottom Layer w0.4: v1@16.38,3.187 16.375,3.182 17.219,2.337 v1(17.221,2.337)
  Bottom Layer w0.5: v1(10.241,1.325) 10.249,1.316 v1(10.791,1.316)
  Bottom Layer w0.75: v1(20.573,19.837) v1(21.082,19.837) ; IC3.2@21.082,19.83 21.1,19.812 v1(22.276,19.812)
  other v1: 26.196,-2.49 29.202,-2.29 14.656,-1.041 13.995,-1.016 8.8,-0.6 16.358,3.197 25.527,3.226 26.213,3.226 24.6,3.3 7.823,3.708 21.615,5.309 18.847,5.486 21.59,5.969 18.847,6.02 17.932,16.389 20.821,16.949 21.61,19.834 23.317,19.945 6.544,22.657 7.844,22.657 9.144,22.657 10.344,22.657 11.544,22.657 14.411,23.3 19.904,23.597 21.204,23.597 22.504,23.597 23.704,23.597 24.904,23.597 6.544,23.622 7.844,23.622 9.144,23.622 10.344,23.622 11.544,23.622 26.458,23.673 27.758,23.673 29.058,23.673 30.258,23.673 31.458,23.673 6.569,24.613 7.869,24.613 9.169,24.613 10.369,24.613 11.569,24.613 19.879,24.638 21.179,24.638 22.479,24.638 23.679,24.638 24.879,24.638 26.458,24.663 27.758,24.663 29.058,24.663 30.258,24.663 31.458,24.663
  other v2: 11.709,4.768 14.109,4.768 18.059,7.518 20.803,11.1 21.387,11.1
  other v3: 27.686,3.912
INT: IC1.12 J1.5 | length 4.3
  Bottom Layer w0.254: IC1.12 15.8,3 17,1.8 J1.5
LV_SCL: IC1.23 IC2.2 R3.1 | length 11.2
  Bottom Layer w0.254: IC1.23 10.391,4.6 9.25,3.459 R3.1 9.25,1.57 13.145,-2.325 IC2.2
LV_SDA: IC1.24 IC2.3 R4.1 | length 24.1
  Bottom Layer w0.254: IC1.24 9.85,5 R4.1 8.164,5.486 6.706,5.486 6.147,4.928 6.147,2.286 6.909,1.524 8.255,1.524 9.379,0.4 9.9,0.4 13.1,-2.8 13.1,-3.3 13.4,-3.6 15.4,-3.6 15.7,-3.3 15.7,-1.897 15.478,-1.675 IC2.3
MOTOR_N: J1.2 J2.2 | length 7.5
  Top Layer w0.381: J2.2 8.06,-0.009 10.627,-0.009 11.379,-0.762 12.878,-0.762 13.25,-0.39 J1.2
MOTOR_P: J1.3 J2.1 | length 10.2
  Top Layer w0.381: J2.1 6.2,1.6 6.8,2.2 12.9,2.2 J1.3
NetC2_1: C2.1 IC1.10 | length 10
  Top Layer w0.254: C2.1 12.47,3.25 13.157,3.937 14.586,3.937 15.856,2.667 16.713,2.667 v1(17.424,3.378)
  Bottom Layer w0.254: IC1.10 16.989,3.8 17.411,3.378 v1(17.424,3.378)
NetC7_1: C7.1 IC3.4 | length 1.7
  Bottom Layer w0.4: IC3.4 17.929,18.846 17.929,17.193 C7.1
NetD1_2: D1.2 R7.2 | length 2.1
  Top Layer w0.45: D1.2 19.835,18.99 19.835,16.952 R7.2
NOT_BUFF_EMG_N: IC5.5 IC7.1 R6.2 | length 10.1
  Top Layer w0.381: IC5.5 17.825,11.075 ; R6.2 18.3,13.1 18.6,12.8 18.6,11.6 18.075,11.075 17.825,11.075 ; IC7.1 19.5,9.4 17.825,11.075
NOT_BUFF_EMG_P: IC5.3 IC6.1 R5.2 | length 9.9
  Top Layer w0.381: R5.2 19.9,13.1 19.6,12.8 19.6,11 20.2,10.4 21.1,10.4 IC5.3 21.16,10.39 21.694,10.39 22.25,9.834 IC6.1
SCL: IC2.7 IC4.6 J1.7 R2.1 | length 30.7
  Bottom Layer w0.381: IC2.7 18.458,-2.318 19.284,-2.318 19.5,-2.102 19.5,-1.9 ; J1.7 19.5,-0.3 ; R2.1 20.1,-2.5 19.5,-1.9 ; v1@29.949,3.827 v1(29.972,3.85) ; v1(30.658,3.85) v1(29.972,3.85) ; 19.5,-1.9 19.5,-0.3 ; 19.5,-0.3 20.216,-1.016 31.284,-1.016 32.2,-0.1 32.2,5.1 31.644,5.656 29.215,5.656 28.992,5.433 28.992,4.266 29.395,3.863 29.959,3.863 v1(29.972,3.85)
SDA: IC2.6 IC4.7 J1.9 R1.1 | length 23.5
  Top Layer w0.381: v1(18.451,-1.675) 21.425,-1.675 22,-1.1 22,-0.58 ; J1.9 22,-0.58 ; v1(23.198,-1.778) 22,-0.58
  Bottom Layer w0.381: J1.9 22.104,0.496 22.104,-0.132 22.327,-0.356 31.144,-0.356 31.7,0.2 31.7,4.2 31.375,4.525 v1(30.2,4.525)
  other v1: 30.747,4.529
SEL_1: IC4.1 IC6.6 | length 4.1
  Top Layer w0.381: IC6.6 23.05,3.75 24.475,5.175 IC4.1
SEL_2: IC4.2 IC7.6 | length 11.5
  Top Layer w0.381: IC7.6 19.5,4.4 19.8,4.7 22.9,4.7 24.2,6 26.8,6 27.2,5.6 27.2,4.748 26.977,4.525 IC4.2
pads on no net: IC1.1 IC1.2 IC1.3 IC1.4 IC1.5 IC1.6 IC1.7 IC1.14 IC1.15 IC1.16 IC1.17 IC1.19 IC1.21 IC1.25 IC4.3 IC4.5 J1.1 J1.16 J1.17 J1.18 J2.3 J2.4

## Polygon pours and split planes (outlines as drawn)
+3V3 on Bottom Layer "+3V3_L04_P005" (solid, pour order 5): 16.256,9.373 16.281,9.398 17.501,9.398 17.501,8.738 16.942,8.179 16.942,7.468 18.466,5.944 18.466,5.067 19.152,4.381 19.152,3.175 18.364,3.175 17.526,4.013 17.526,5.664 16.18,7.01 16.154,7.01
+3V3 on Bottom Layer "+3V3_L04_P000" (solid, pour order 0): 22.098,2.591 22.123,2.591 23.266,2.591 23.622,2.972 23.622,3.886 24.105,3.886 24.105,1.803 24.003,1.702 19.228,1.702 18.618,2.311 18.618,4.47 19.202,4.775 19.482,4.775 19.482,2.896 19.812,2.565 20.828,2.565 21.209,2.946 21.209,4.775 21.946,4.775 21.946,2.743
+3V3 on Top Layer "+3V3_L01_P002" (solid, pour order 2): 30.48,-0.229 30.607,-0.356 30.607,-3.658 30.404,-3.886 23.698,-3.886 23.698,-0.483 23.952,-0.229
1V8 on Top Layer "1V8_L01_P001" (solid, pour order 1): 3.048,6.756 5.232,6.756 7.137,4.851 7.137,2.54 6.223,2.54 5.715,3.048 5.715,4.623 4.547,5.791 2.515,5.791 2.515,5.817 2.159,6.172 2.159,7.29 2.515,7.29
GND on Int2 (GND) (split plane): 37.49,0.51 34.5,0.51 34.4,0.501 34.305,0.472 34.216,0.424 34.139,0.361 34.076,0.284 34.028,0.195 33.999,0.1 33.99,0 33.99,-3.89 4.01,-3.89 4.01,0 4.001,0.1 3.972,0.195 3.924,0.284 3.861,0.361 3.784,0.424 3.695,0.472 3.6,0.501 3.5,0.51 0.51,0.51 0.51,25.49 37.49,25.49
GND on Int1 (GND) (split plane): 37.49,0.51 34.5,0.51 34.4,0.501 34.305,0.472 34.216,0.424 34.139,0.361 34.076,0.284 34.028,0.195 33.999,0.1 33.99,0 33.99,-3.89 4.01,-3.89 4.01,0 4.001,0.1 3.972,0.195 3.924,0.284 3.861,0.361 3.784,0.424 3.695,0.472 3.6,0.501 3.5,0.51 0.51,0.51 0.51,25.49 37.49,25.49

## Silkscreen, mask and mechanical layers (free items; w line width, h text height)
Top Overlay:
  circle w0.254: c3.5,3.5 r2
  circle w0.254: c34.5,3.5 r2
  circle w0.254: c34.5,22.5 r2
  circle w0.254: c3.5,22.5 r2
Board Shape:
  lines w0.254: 0,0 38,0 38,26 0,26 0,0